# Altium PCB Test.PcbDoc
Units mil, origin at the board's own origin, x right, y up, seen from the top; angles counter-clockwise.
Board outline 4174 x 2405 mil, 2 copper layers (Top Layer, Bottom Layer); 28 components, 26 nets, 133 pads, 0 vias.
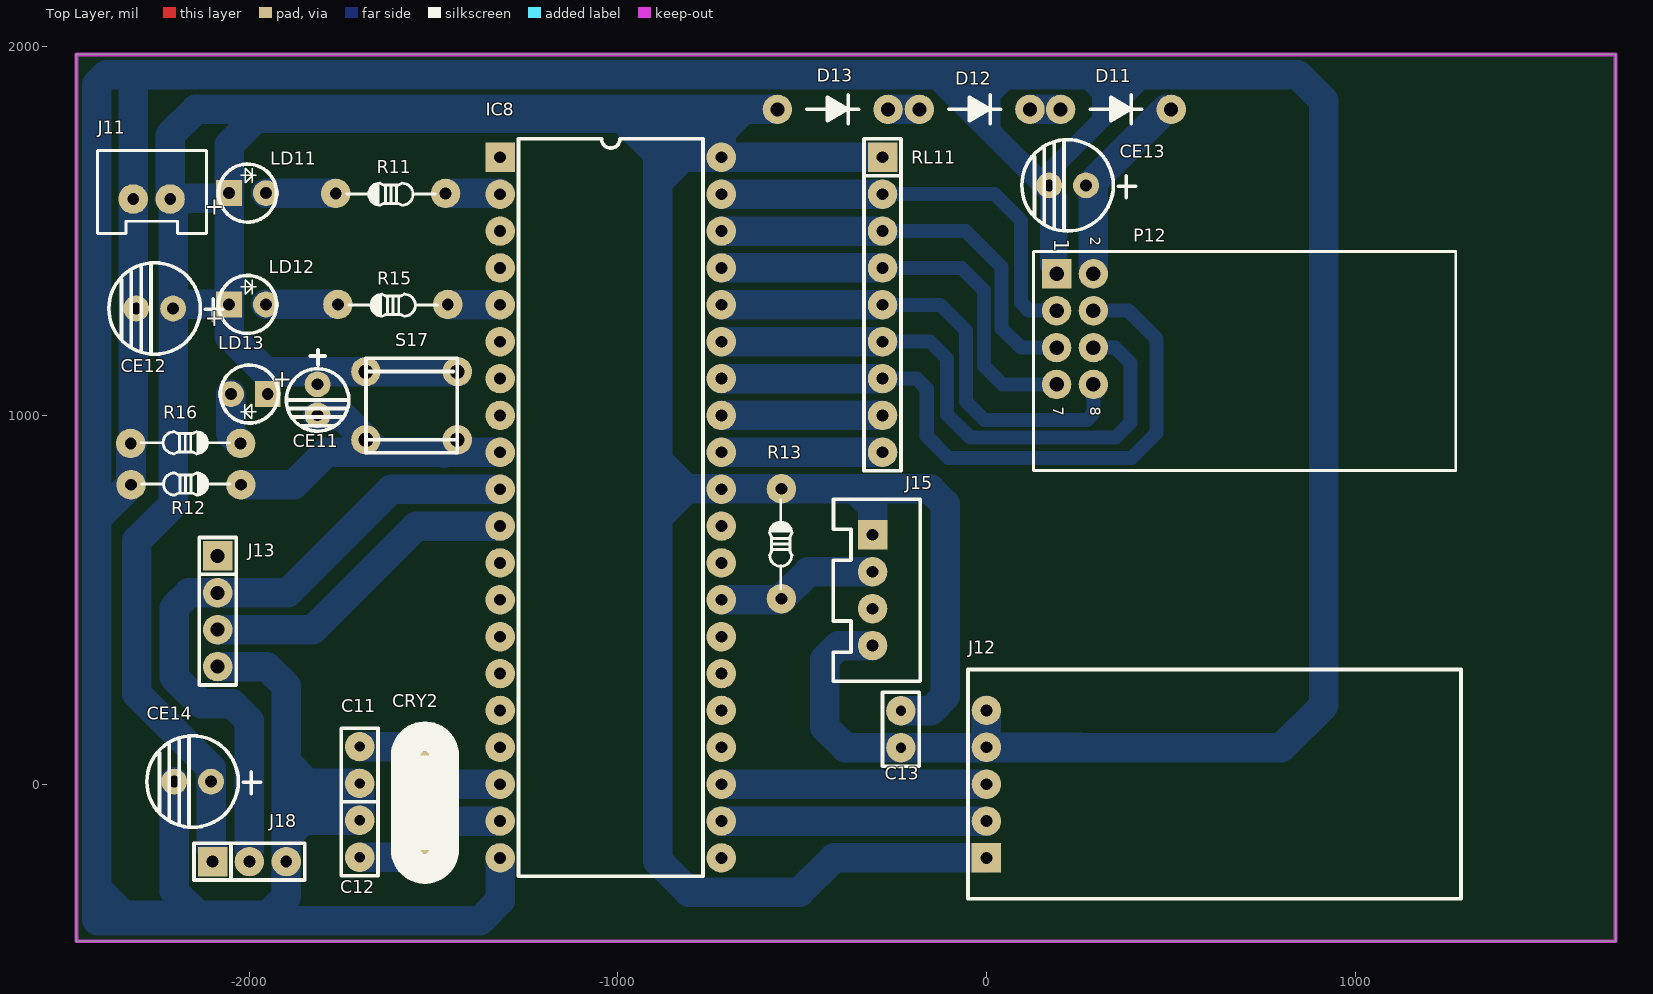
[diagram p0: Top Layer view]
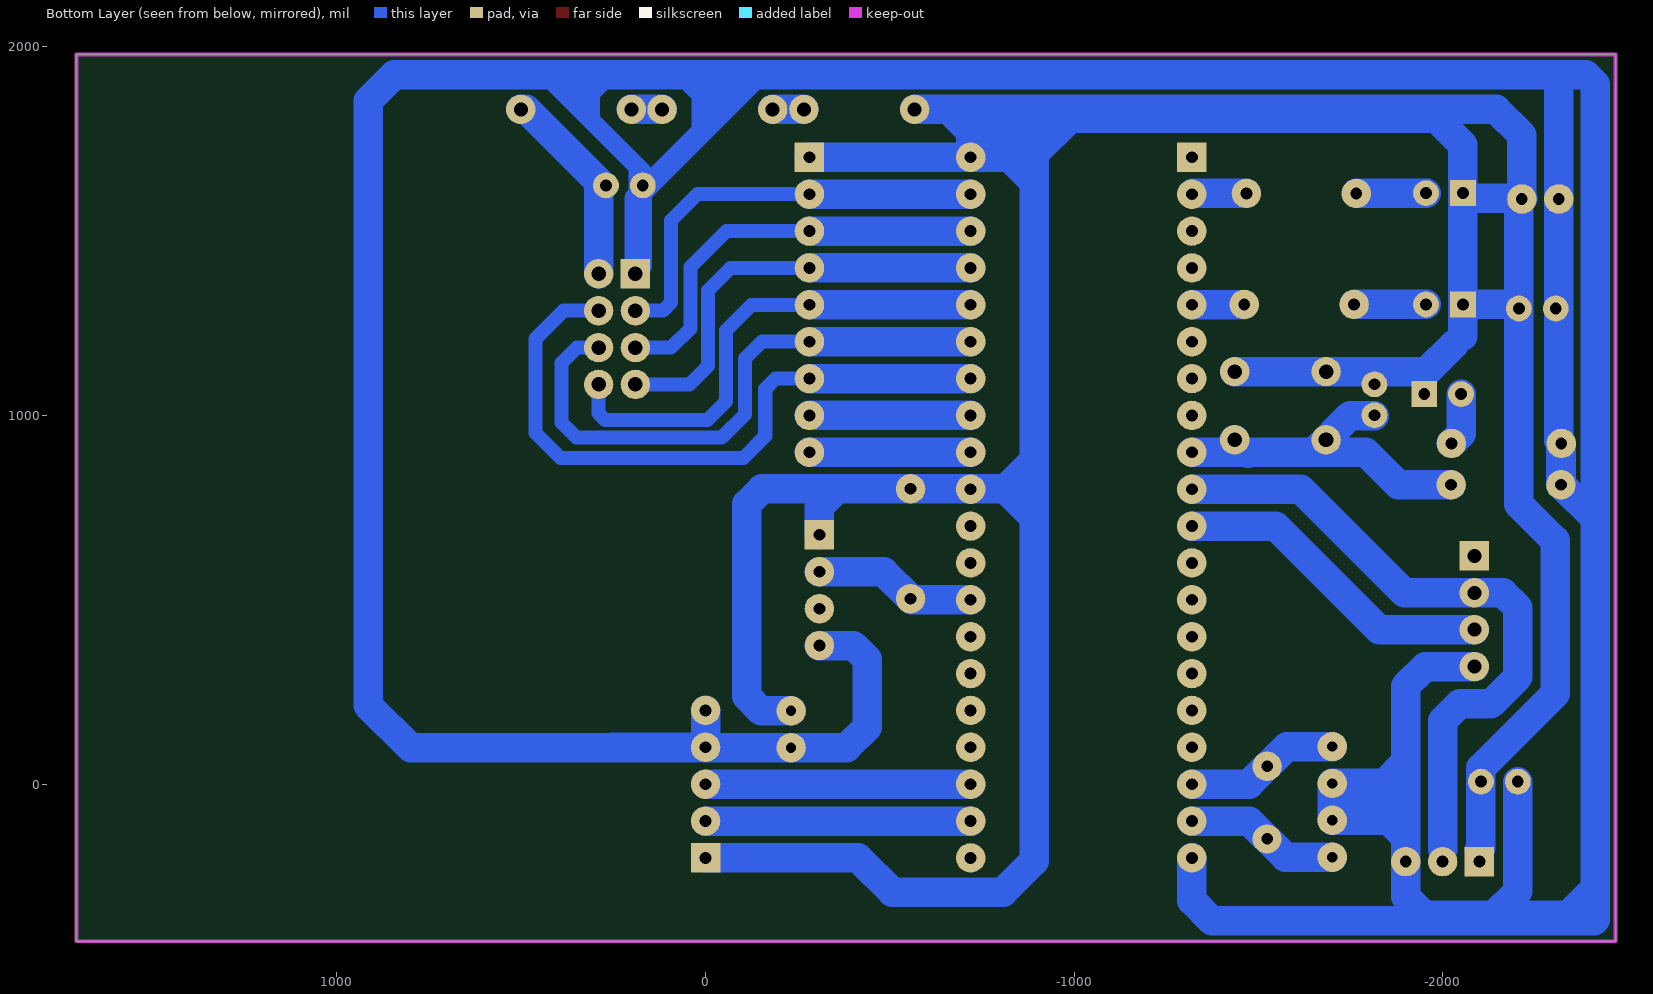
[diagram p1: Bottom Layer view, seen from below]
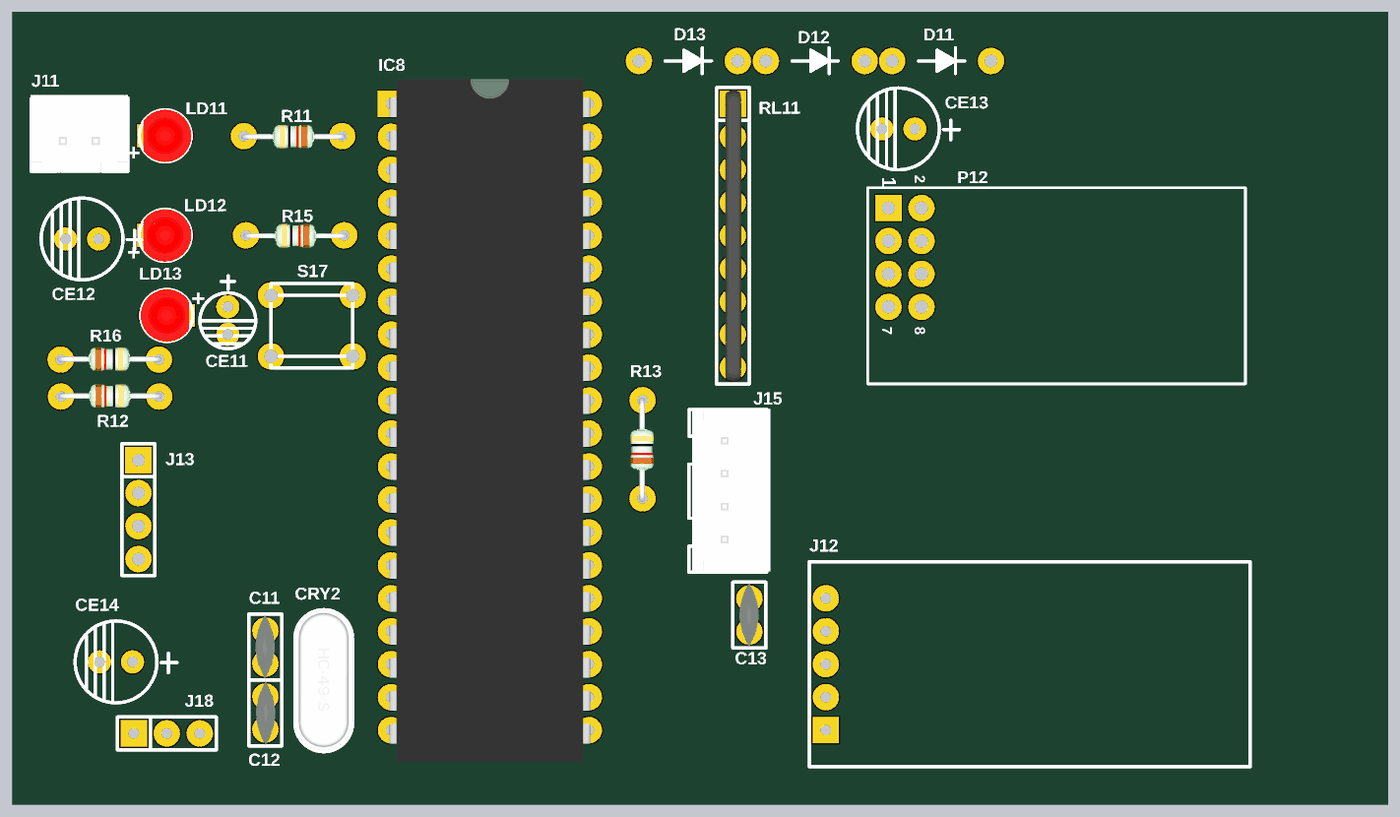
[diagram p2: 3D render of the assembled board from above, using the file's embedded part models]

## Layer stack, top to bottom
Top Layer: signal copper 1.4
Dielectric: dielectric 12.6, FR-4, Dk 4.8
Bottom Layer: signal copper 1.4

## Board outline
-2468,-426 1706,-426 1706,1979 -2468,1979

## Design rules (kind name [scope] priority, off if disabled: settings)
Clearance [All] p1: gap=10
ComponentClearance [InNet('No Net') vs InNet('No Net')] p1: gap=10 collisioncheckmode=3 verticalgap=10 showdistances=FALSE
FabricationTestpoint [(IsPad And (OnTopLayer Or OnBottomLayer))] p1: side=3 testpointundercomponent=TRUE minsize=40 maxsize=100 preferedsize=60 minholesize=0 maxholesize=40 preferedholesize=32 testpointgrid=1 allowsidetop=TRUE allowsidebottom=TRUE usegrid=TRUE gridtolerance=0.01
Height [InNet('No Net')] p1: minheight=0 maxheight=1000 prefheight=500
HoleToHoleClearance [InNet('No Net') vs InNet('No Net')] p1: gap=10 allowstackedmicrovias=TRUE
MinimumSolderMaskSliver [InNet('No Net') vs InNet('No Net')] p1: minsoldermaskwidth=10
PolygonConnect [All] p1: connectstyle=Relief reliefconductorwidth=10 reliefentries=4 polygonreliefangle="90 Angle"
RoutingVias [All] p1: holewidth=28 width=50 viastyle="Through Hole" minholewidth=28 minwidth=50 maxholewidth=28 maxwidth=50
SilkToSilkClearance [InNet('No Net') vs InNet('No Net')] p1: silktosilkclearance=10
SilkscreenOverComponentPads [InNet('No Net') vs InNet('No Net')] p1: minsilkscreentomaskgap=10
SolderMaskExpansion [All] p1: expansion=4
Width [All] p1: maxlimit=100 minlimit=10 preferedwidth=10
21 further rules are at their usual default settings.

## Components (designator, comment, footprint, x,y, rotation, side; value= is the part's Value field where it differs from the comment)
C11 "22pF" RAD0.1 -1700,52 r90 top
C12 "22pF" RAD0.1 -1700,-148 r270 top
C13 "0.1uF" RAD0.1 -232,149 r90 top
CE11 "1uF" RB.1/.1 -1814,1042 r0 top
CE12 "220uF" RB.1/.2 -2256,1290 r270 top
CE13 "220uF" RB.1/.2 220,1624 r270 top
CE14 "220uF" RB.1/.2 -2153,7 r270 top
CRY2 "12.00MHz" XTAL1 -1523,-50 r270 top
D11 "1N4007" DIODE0.3 351,1830 r0 top
D12 "1N4007" DIODE0.3 -32,1830 r0 top
D13 "1N4007" DIODE0.3 -417,1830 r0 top
IC8 "STC89C52" DIP40 -1019,750 r0 top
J11 "CON2" HJ2P2.54 -2214,1587 r180 top
J12 "CON5" SIP5 0,0 r90 top
J13 "CON4" SIP4 -2085,469 r270 top
J15 "DHT11" HJ4P2.54 -309,676 r270 top
J18 "PM2.5" SIP3 -1999,-210 r0 top
LD11 "LED" LED3F-R -2004,1603 r0 top
LD12 "LED" LED3F-R -2004,1301 r0 top
LD13 "LED" LED3F-R -1999,1058 r180 top
P12 "NRF24l01" HDR2.54-2X4 190,1384 r270 top (schematic designator P1)
R11 "1K" AXIAL0.3 -1616,1602 r180 top
R12 "10K" AXIAL0.3 -2171,812 r0 top
R13 "4.7K" AXIAL0.3 -556,652 r90 top
R15 "1K" AXIAL0.3 -1610,1301 r180 top
R16 "1K" AXIAL0.3 -2172,924 r0 top
RL11 "10K排阻" RES9P -395,1319 r270 top
S17 "Rst" SW-PB4DS -1683,1119 r0 top

## Footprints (in the part's own frame and the unit in brackets; to place one, negate y for a bottom-side part, rotate by r counter-clockwise, add the part's x,y. Pads: shape width x height; smd on the part's side, far side on the other; paste and mask are expansions set on the pad)
AXIAL0.3 [mil]
  round 80 hole 32: 1(-149,0) 2(149,0)
  silkscreen extent -121,-28 119,32, body extent -158,-34 156,37, height 95
DIODE0.3 [mil]
  round 80 hole 38: A(-150,0) K(150,0)
  silkscreen extent -70,-38 70,40
DIP40 [mil]
  rect 80x80 hole 32: 1(-300,950)
  round 80 hole 32: 2(-300,850) 3(-300,750) 4(-300,650) 5(-300,550) 6(-300,450) 7(-300,350) 8(-300,250) 9(-300,150) 10(-300,50) 11(-300,-50) 12(-300,-150) 13(-300,-250) 14(-300,-350) 15(-300,-450) 16(-300,-550) 17(-300,-650) 18(-300,-750) 19(-300,-850) 20(-300,-950) 21(300,-950) 22(300,-850) 23(300,-750) 24(300,-650) 25(300,-550) 26(300,-450) 27(300,-350) 28(300,-250) 29(300,-150) 30(300,-50) 31(300,50) 32(300,150) 33(300,250) 34(300,350) 35(300,450) 36(300,550) 37(300,650) 38(300,750) 39(300,850) 40(300,950)
  silkscreen extent -250,-1000 250,1000, body extent -305,-1046 305,1025, height 196
HDR2.54-2X4 [mil]
  rect 80x80 hole 39.37: 1(0,0)
  round 80 hole 39.37: 2(0,100) 3(100,0) 4(100,100) 5(200,0) 6(200,100) 7(300,0) 8(300,100)
  silkscreen extent -61,-63 533,1083
HJ2P2.54 [mm]
  round 0.2 on Top Overlay: 1(-2.5,2.364) 1(-2.5,2.364) 1(-2.5,-3.336) 1(-2.5,-3.336) 1(-0.5,2.364) 1(-0.5,2.364) 1(-0.5,1.536) 1(-0.5,1.536) 1(3.048,1.536) 1(3.048,1.536) 1(3.048,2.364) 1(3.048,2.364) 1(5,2.364) 1(5,2.364) 1(5,-3.336) 1(5,-3.336)
  round 2.032 hole 0.8: 1(0,0) 2(2.54,0)
  silkscreen extent -2.5,-3.34 5,2.36, body extent -2.48,-3.55 5.02,2.45, height 7
HJ4P2.54 [mil]
  rect 80x80 hole 31.5: 1(0,0)
  round 80 hole 31.5: 2(100,0) 3(200,0) 4(300,0)
  silkscreen extent -97,-107 397,130, body extent -98,-96 394,140, height 276
LED3F-R [mil]
  rect 70x70 hole 32: A(-50,0)
  round 70 hole 32: K(50,0)
  silkscreen extent -79,-79 79,79, body extent -67,-80 80,80, height 236
RAD0.1 [mil]
  round 80 hole 28: 1(50,0) 2(-50,0)
  silkscreen extent -100,-50 100,50, body extent -98,-28 98,30, height 217
RB.1/.1 [mil]
  round 70 hole 32: 1(0,42.37) 2(0,-41.37)
  silkscreen extent -84,-85 85,136
RB.1/.2 [mil]
  round 70 hole 32: 1(0,50) 2(0,-50)
  silkscreen extent -124,-124 124,185, body extent -124,-124 124,124, height 240
RES9P [mil]
  rect 80x80 hole 32: 1(-381,113)
  round 80 hole 32: 2(-281,113) 3(-181,113) 4(-81,113) 5(19,113) 6(119,113) 7(219,113) 8(319,113) 9(419,113)
  silkscreen extent -431,63 469,163, body extent -424,90 462,139, height 169
SIP3 [mil]
  rect 80x80 hole 32: 1(-100,0)
  round 80 hole 32: 2(0,0) 3(100,0)
  silkscreen extent -150,-50 150,50, body extent -150,-49 150,50, height 315
SIP4 [mil]
  rect 80x80 hole 38: 1(-150,0)
  round 80 hole 38: 2(-50,0) 3(50,0) 4(150,0)
  silkscreen extent -200,-50 200,50, body extent -200,-49 200,50, height 315
SIP5 [mil]
  rect 80x80 hole 32: 1(-200,0)
  round 80 hole 32: 2(-100,0) 3(0,0) 4(100,0) 5(200,0)
  silkscreen extent -311,-1287 311,50, body extent -250,-49 250,50, height 315
SW-PB4DS [mil]
  round 80 hole 39.37: 1(0,0) 1(248.03,0) 2(248.03,-185.04)
  round 80 hole 40: 2(0,-185.04)
  silkscreen extent 0,-220 248,36, body extent -6,-221 254,35, height 236
XTAL1 [mm]
  round 2.032 hole 0.8: 1(-2.5,0)
  round 2 hole 0.8: 2(2.5,0)
  silkscreen extent -5.5,-2.25 5.5,2.26, body extent -5.45,-2.26 5.35,2.24, height 3.5

## Part data
C11 C12: library part CAP, "Capacitor"
C13: library part CAP
CE11 CE12 CE13 CE14: library part ELECTRO1
CRY2: library part CRYSTAL
D11 D12 D13: library part DIODE
IC8: library part AT89C51
J13: library part Con4
J15: library part CON4
J18: library part CON3, "Connector"
P12: library part "Header 4X2", "Header, 4-Pin, Dual row"
R11 R12 R13 R15 R16: library part RES1
RL11: library part RESL1
S17: library part SW-PB

## Nets (pads, with @x,y where several pads share a name; then routed paths per layer and width w, separated by ;. In a path a pad name is that pad's centre, name@x,y a point inside that pad or via, vN(x,y) a via of type N, cw(c..) or ccw(c..) an arc to the next point about the centre after c; other vN are vias at no path point)
CE: IC8.39 P12.3 RL11.2 | length 1170.5
  Bottom Layer w38: RL11.2 22,1600 93,1529 93,1306 115,1284 P12.3
  Bottom Layer w80: IC8.39 RL11.2
CSN: IC8.34 P12.4 RL11.7 | length 1829.7
  Bottom Layer w38: RL11.7 -190,1100 -162,1072 -162,944 -103,885 393,885 461,953 461,1208 385,1284 P12.4
  Bottom Layer w80: IC8.34 RL11.7
DHT11: IC8.28 J15.2 R13.1 | length 441.5
  Bottom Layer w80: IC8.28 -559,500 R13.1 -483,576 J15.2
GND: C11.2 C12.2 C13.2 CE12.2 CE13.2 CE14.2 IC8.20 J11.2 J12.4 J12.5 J13.4 J15.4 J18.3 P12.1 R12.1 R16.1 | length 17957.5
  Bottom Layer w38: CE13.2 CE13.2@190,1604 ; P12.1 190,1493 CE13.2@190,1604 ; 252,1924 305,1871 305,1795 ; 890,1903 413,1903 305,1795 ; CE13.2@190,1604 190,1680 305,1795
  Bottom Layer w50: P12.1 170,1404 170,1660 342,1832 ; 339,1924 342,1921 342,1832 ; 413,1903 342,1832
  Bottom Layer w60: -184,1924 -145,1924 -26,1805 ; -26,1924 -26,1805 ; 8,1885 8,1771 15.5,1763.5 ; P12.1 190,1589 15.5,1763.5 ; -26,1805 15.5,1763.5
  Bottom Layer w80: -2413,1882 -2413,1798 ; R12.1 -2320,923 R16.1 ; -2309,1924 -2314,1919 J11.2 -2314,931 R16.1 ; CE14.2 -2203,-291 -2139,-355 ; J13.4 -1952,319 -1899,266 -1899,-305 -1949,-355 -2340,-355 -2413,-282 -2413,-120 ; -1899,-143 -1854,-98 C12.2 -1700,-55 ; -1899,-55 -1700,-55 ; -1899,60 -1841,2 C11.2 -1700,-55 ; IC8.20 -1319,-316 -1374,-371 -2410,-371 -2413,-368 -2413,-120 ; J15.4 -401,376 -438,339 -438,154 -383,99 800,99 915,214 915,1853 844,1924 339,1924 111,1924 ; -65,1924 -65,1890 -26,1851 47,1924 111,1924 ; J12.4@-1,99 J12.4 ; J12.5 J12.4 ; 251,100 J12.4 ; -2413,-120 -2413,659 ; -2413,659 -2413,720 -2321,812 R16.1 ; -2413,659 -2413,1798 ; -2413,1798 -2413,1898 -2387,1924 111,1924
IRQ: IC8.36 P12.8 RL11.5 | length 1336.2
  Bottom Layer w38: RL11.5 -125,1300 -55,1230 -55,1038 -5,988 272,988 290,1006 P12.8
  Bottom Layer w80: IC8.36 RL11.5
MCU_RST: CE11.2 IC8.9 R12.2 S17.2 | length 1281.2
  Bottom Layer w80: R12.2 -1879,812 -1791,900 IC8.9 -1649.04,900 -1748.41,999.37 CE11.2@-1814,999.37 ; -1470,898 -1468,900 ; S17.2@-1434.97,933.96 S17.2@-1433,931.99
MISO: IC8.37 P12.7 RL11.4 | length 1160
  Bottom Layer w38: RL11.4 -68,1400 -7,1339 -7,1134 43,1084 P12.7
  Bottom Layer w80: IC8.37 RL11.4
MOSI: IC8.35 P12.6 RL11.6 | length 1602.5
  Bottom Layer w38: RL11.6 -153,1200 -107,1154 -107,1003 -44,940 350,940 391,981 391,1142 349,1184 P12.6
  Bottom Layer w80: IC8.35 RL11.6
NetCE13_1: CE13.1 D11.K P12.2 | length 542.2
  Bottom Layer w80: P12.2 290,1634 486,1830 D11.K
NetD11_A: D11.A D12.K | length 83
  Bottom Layer w80: D12.K D11.A
NetD12_A: D12.A D13.K | length 85
  Bottom Layer w80: D13.K D12.A
NetIC8_11: IC8.11 J13.3 | length 882.4
  Bottom Layer w80: J13.3 -1827,419 -1546,700 IC8.11
NetIC8_32: IC8.32 RL11.9 | length 437
  Bottom Layer w80: IC8.32 RL11.9
NetIC8_33: IC8.33 RL11.8 | length 437
  Bottom Layer w80: IC8.33 RL11.8
NetLD11_K: LD11.K R11.2 | length 188
  Bottom Layer w80: LD11.K R11.2@-1766,1603
NetLD12_K: LD12.K R15.2 | length 195
  Bottom Layer w80: LD12.K R15.2
NetLD13_K: LD13.K R16.2 | length 144.8
  Bottom Layer w80: LD13.K -2049,950 R16.2
OSC1: C12.1 CRY2.2 IC8.19 | length 421.6
  Bottom Layer w80: C12.1 -1572.57,-198 -1474.57,-100 IC8.19
OSC2: C11.1 CRY2.1 IC8.18 | length 423.2
  Bottom Layer w80: C11.1 -1576.57,102 -1474.57,0 IC8.18
P11: IC8.2 R11.1 | length 146
  Bottom Layer w80: R11.1 IC8.2@-1321,1602
P14: IC8.5 R15.1 | length 141
  Bottom Layer w80: R15.1@-1460,1300 IC8.5
PM25: IC8.10 J13.2 J18.2 | length 1805.3
  Bottom Layer w80: J13.2 -2163,519 -2203,479 -2203,291 -2130,218 -2045,218 -1999,172 J18.2@-1999,-178 ; J13.2@-2082,519 -1895,519 -1614,800 IC8.10
SCK: IC8.38 P12.5 RL11.3 | length 1137.1
  Bottom Layer w38: RL11.3 -57,1500 41,1402 41,1236 93,1184 P12.5
  Bottom Layer w80: IC8.38 RL11.3
SCL: IC8.22 J12.2 | length 719
  Bottom Layer w80: IC8.22 J12.2
SDA: IC8.23 J12.3 | length 719
  Bottom Layer w80: IC8.23 J12.3
VCC: C13.1 CE11.1 CE12.1 CE14.1 D13.A IC8.31 IC8.40 J11.1@-2214,1587 J12.1 J15.1 J18.1 LD11.A LD12.A LD13.A R13.2 RL11.1 S17.1 | length 14073.2
  Bottom Layer w80: -2304,268 -2304,661 -2206,759 CE12.1 ; -2304,598 -2304,245 -2103,44 -2103,-174 J18.1@-2099,-178 ; J11.1@-2214,1587 -2214,1760 -2144,1830 -1797,1830 ; -2054,1215 -2054,1589 -2216,1589 -2206,1579 CE12.1 ; LD12.A -2195,1301 CE12.1 ; LD11.A -2054,1734 ; -2030,1193 -1956,1119 S17.1@-1434.97,1119 ; -988,1806 -891,1709 ; -926,1744 -745,1744 -780,1709 -891,1709 ; -891,723 -813,801 -634,801 ; J15.1 -309,753 -357,801 -403,801 ; RL11.1 -514,1700 ; C13.1 -151,199 -112,238 -112,760 -153,801 -403,801 ; J12.1 -414,-200 -507,-293 -807,-293 -891,-209 -891,1162 ; -2054,1734 -1982,1806 -683,1806 -659,1830 ; -2054,1734 -1958,1830 D13.A -659,1830 ; -891,1162 -891,878 -814,801 -634,801 ; -891,1162 -891,1516 ; -891,1516 -891,1633 -824,1700 -514,1700 ; -891,1516 -891,1709 ; -659,1830 -719,1770 IC8.40 -514,1700 ; -634,801 R13.2 -403,801
pads on no net: IC8.1 IC8.3 IC8.4 IC8.6 IC8.7 IC8.8 IC8.12 IC8.13 IC8.14 IC8.15 IC8.16 IC8.17 IC8.21 IC8.24 IC8.25 IC8.26 IC8.27 IC8.29 IC8.30 J11.1@-2115.57,1493.91 J11.1@-2115.57,1718.32 J11.1@-2194.32,1493.91 J11.1@-2194.32,1526.53 J11.1@-2334,1493.91 J11.1@-2334,1526.53 J11.1@-2410.85,1493.91 J11.1@-2410.85,1718.32 J13.1 J15.3

## Keep-outs
Keep-Out Layer:
  the board outline again, w10

## Text inside footprints (layer, text, board x,y; h text height)
LD11: Top Overlay "+" at -2120,1528 h80
LD12: Top Overlay "+" at -2120,1226 h80
LD13: Top Overlay "+" at -1883,1133 h80 r180
P12: Top Overlay "2" at 270,1484 h50 r270; Top Overlay "1" at 170,1479 h70 r270; Top Overlay "7" at 170,1024 h50 r270; Top Overlay "8" at 270,1024 h50 r270